# Altium PCB PCB2.PcbDoc
Units mm, origin at the board's own origin, x right, y up, seen from the top; angles counter-clockwise.
Board outline 115 x 60 mm, 2 copper layers (Top Layer, Bottom Layer); 32 components, 23 nets, 151 pads, 66 vias.
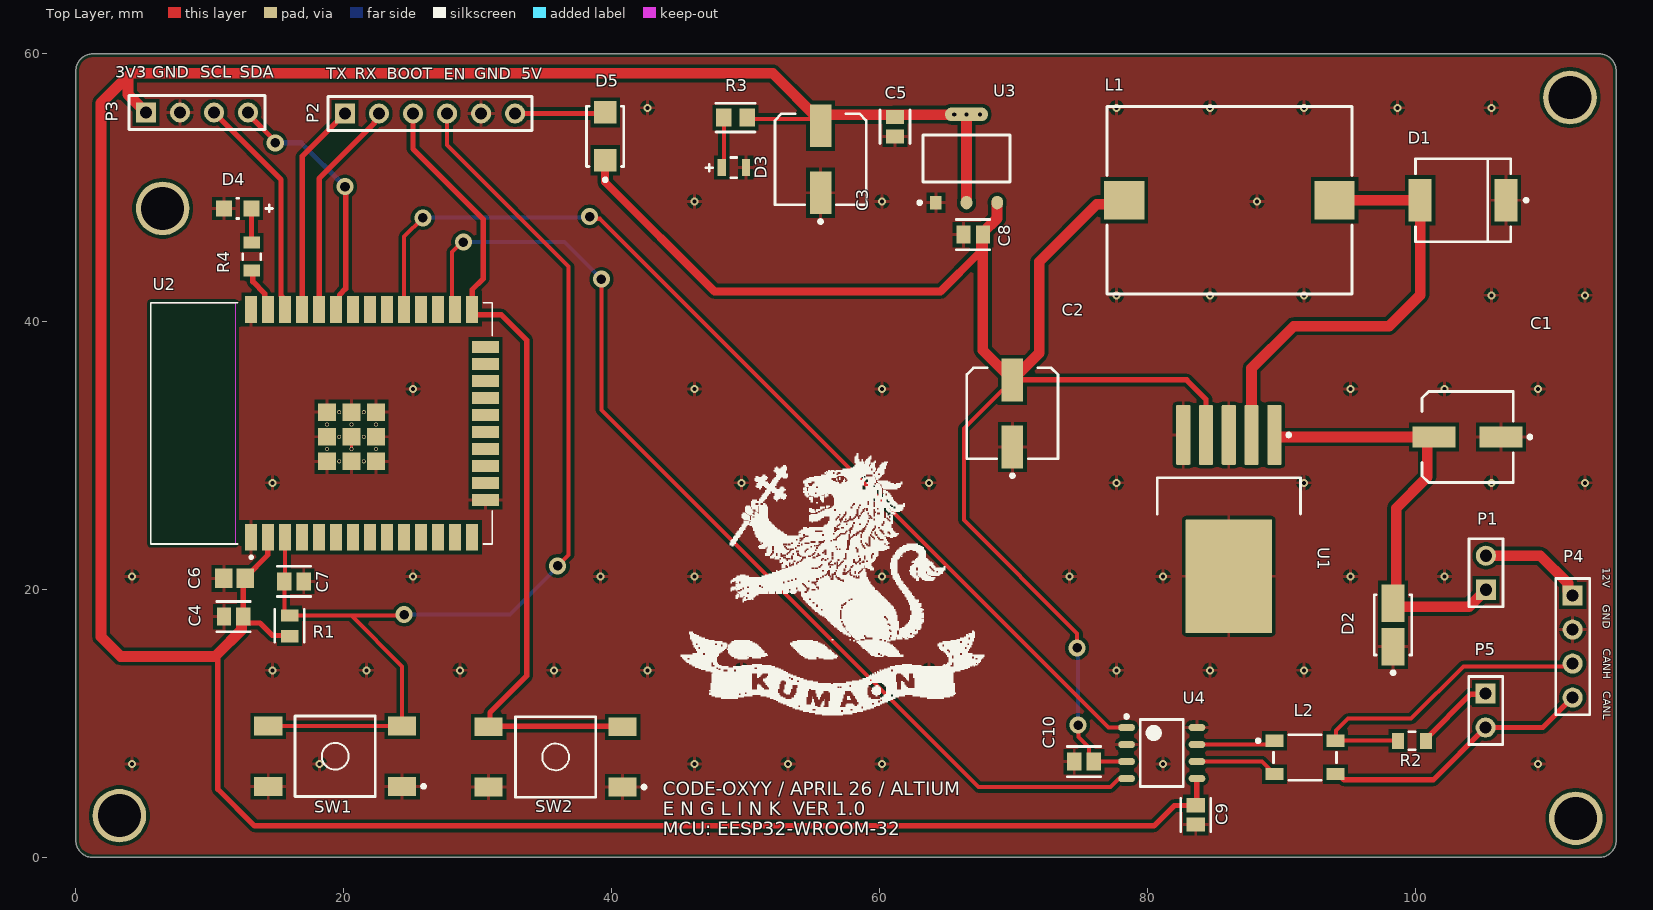
[diagram p0: Top Layer view]
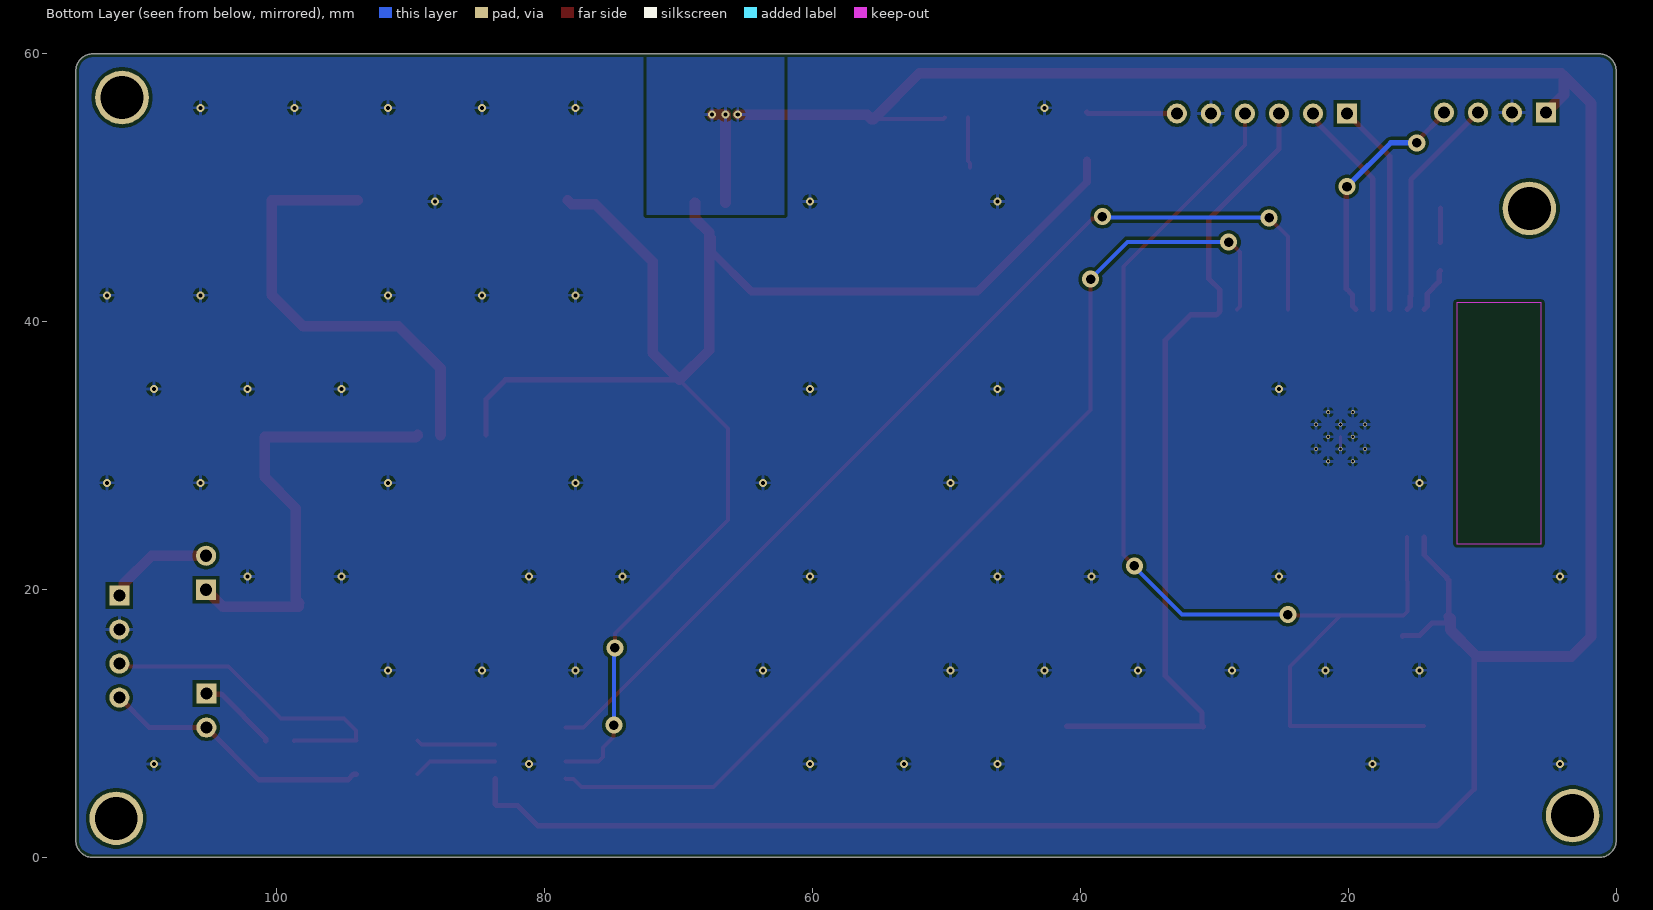
[diagram p1: Bottom Layer view, seen from below]
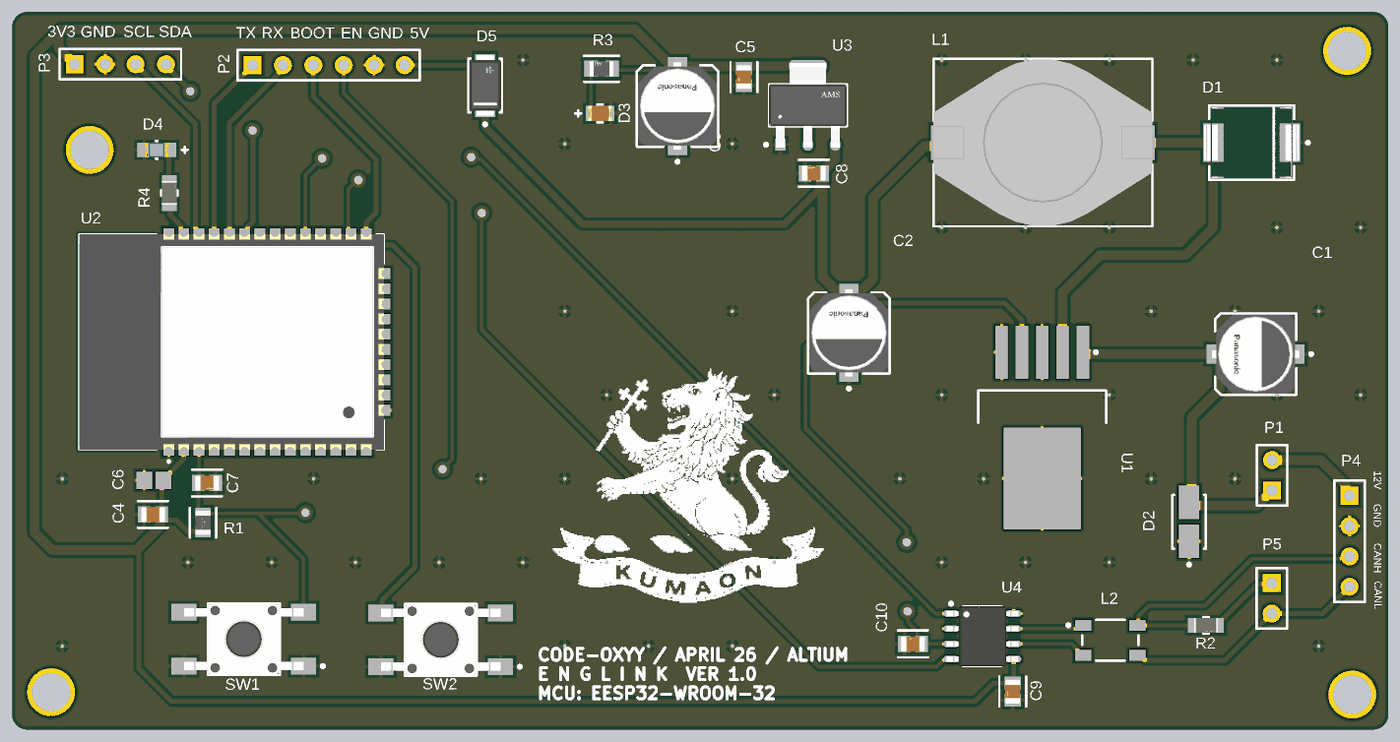
[diagram p2: 3D render of the assembled board from above, using the file's embedded part models]

## Layer stack, top to bottom
Top Solder: solder mask 0.0102, Solder Resist, Dk 3.5
Top Layer: signal copper 0.0356
Dielectric 1: dielectric 0.32, FR-4, Dk 4.8
Bottom Layer: signal copper 0.0356
Bottom Solder: solder mask 0.0102, Solder Resist, Dk 3.5

## Board outline
0,1.27 0,58.73 cw(c1.27,58.73) 1.27,60 113.73,60 cw(c113.73,58.73) 115,58.73 115,1.27 cw(c113.73,1.27) 113.73,0 2.5,0 1.27,0 cw(c1.27,1.27)

## Design rules (kind name [scope] priority, off if disabled: settings)
BoardOutlineClearance [All] p1: gap=0.254 ignorepadtopadclearanceinfootprint=FALSE except(0: Arc-SplitContinuation Track-SplitContinuation SMDPad-SplitContinuation THPad-SplitContinuation Via-SplitContinuation Fill-SplitContinuation Poly-SplitContinuation Region-SplitContinuation Text-SplitContinuation)
Clearance [All] p1: gap=0.254 ignorepadtopadclearanceinfootprint=FALSE
PolygonConnect [All] p1: connectstyle=Relief reliefconductorwidth=0.254 reliefentries=4 polygonreliefangle="90 Angle" airgapwidth=0.254
RoutingVias [All] p1: holewidth=0.711 width=1.27 viastyle="Through Hole" minholewidth=0.711 minwidth=1.27 maxholewidth=6 maxwidth=6
SolderMaskExpansion [All] p1: expansion=0.102 istentingtop=FALSE
SupplyNets "Schematic Supply Nets_4" [InNet('+5_USB')] p1: voltage=0.000
SupplyNets "Schematic Supply Nets_3" [InNet('3V3')] p2: voltage=0.000
SupplyNets "Schematic Supply Nets_2" [InNet('GND')] p3: voltage=0.000
SupplyNets "Schematic Supply Nets_1" [InNet('+5')] p4: voltage=0.000
SupplyNets "Schematic Supply Nets" [InNet('+12')] p5: voltage=0.000
Width [All] p1: maxlimit=1 minlimit=0.254 preferedwidth=0.254 minimp=50.000000 maximp=50.000000 favimp=50.000000
30 further rules are at their usual default settings.

## Components (designator, comment, footprint, x,y, rotation, side; value= is the part's Value field where it differs from the comment)
C1 "EEE-TQV101XAP" FP-TQD8-MFG 103.911,31.394 r180 top
C2 "EEE-TQV101XAP" FP-TQD8-MFG 69.926,33.162 r90 top
C3 "EEE-TQV101XAP" FP-TQD8-MFG 55.601,52.134 r90 top
C4 "GRM21BZ71C106KE15L" FP-GRM21B-0_2-e0_2_0_7-IPC_C 11.771,17.983 r180 top
C5 "GRM21BZ71C106KE15L" FP-GRM21B-0_2-e0_2_0_7-IPC_C 61.158,54.562 r270 top
C6 "C0805S104K5RACTU" CAPC2013X145X50NL20T25 11.848,20.839 r0 top
C7 "GRM21BZ71C106KE15L" FP-GRM21B-0_2-e0_2_0_7-IPC_C 16.287,20.614 r0 top
C8 "GRM21BZ71C106KE15L" FP-GRM21B-0_2-e0_2_0_7-IPC_C 66.991,46.507 r180 top
C9 "GRM21BZ71C106KE15L" FP-GRM21B-0_2-e0_2_0_7-IPC_C 83.617,3.175 r270 top
C10 "GRM21BZ71C106KE15L" FP-GRM21B-0_2-e0_2_0_7-IPC_C 75.271,7.163 r180 top
D1 "SS34-E3/57T" FP-95402-MFG 103.577,49.073 r180 top
D2 "SMAJ15CA-E3/5A" VISH-DO-214AC-2_M 98.349,17.374 r90 top
D3 "SML-LX0805SRC-TR" FP-SML-LX0805SRC-TR-MFG 49.124,51.511 r0 top
D4 "SM0805UBWC" FP-SM0805UBWC-MFG 12.078,48.463 r180 top
D5 "SSA34HE3_A/I" FP-95400-MFG 39.522,53.848 r90 top
L1 "SDR1806-330ML" BOUR-SDR1806_V 86.131,49.073 r180 top
L2 "ACT45B-510-2P-TL003" TDK-ACT45B-510-2P-TL003-4_V 91.77,7.468 r0 top
P1 "Header 2" HDR1X2 105.283,19.99 r90 top
P2 "Header 6" HDR1X6 20.091,55.55 r0 top
P3 "Header 4" HDR1X4 5.232,55.626 r0 top
P4 "Header 4" HDR1X4 111.76,19.558 r270 top
P5 "Header 2" HDR1X2 105.258,12.243 r270 top
R1 "CRGCQ0805J10K" FP-CRGCQ0805-IPC_C 15.951,17.297 r270 top value=10KΩ
R2 "AC0805FR-07120RL" FP-AC0805-MFG 99.763,8.712 r0 top value=120Ω
R3 "RMCF0805JG1K00" FP-RMCF0805-IPC_B 49.251,55.245 r180 top
R4 "AC0805FR-07120RL" FP-AC0805-MFG 13.132,44.865 r90 top value=120Ω
SW1 "1301.9320" FP-1301_9320-MFG 19.359,7.559 r180 top
SW2 "1301.9320" FP-1301_9320-MFG 35.818,7.508 r180 top
U1 "LM2596S-5.0/NOPB" KTT0005B_M 86.081,25.248 r270 top
U2 "ESP32-WROOM-32" MODULE_ESP32-WROOM-32 18.337,32.414 r90 top
U3 "AMS1117-3.3" FP-AMS1117-IPC_C 66.497,52.19 r90 top
U4 "TJA1051T/3,118" NXP-SOIC-8_L 81.077,7.798 r0 top

## Footprints (in the part's own frame and the unit in brackets; to place one, negate y for a bottom-side part, rotate by r counter-clockwise, add the part's x,y. Pads: shape width x height; smd on the part's side, far side on the other; paste and mask are expansions set on the pad)
BOUR-SDR1806_V [mm] "SMD, 2-Leads, Body 18.3x14mm"
  rect 3x2.9 smd: 1(-7.85,0) 2(7.85,0)
  silkscreen extent -9.15,-7 9.15,7, body extent -9.15,-7 9.15,7, height 6.6
CAPC2013X145X50NL20T25 [mm] "Chip Capacitor, 2-Leads, Body 2.00x1.25mm, IPC Medium Density"
  rect 1.3x1.45 smd: 1(-0.8,0) 2(0.8,0)
  body extent -1.1,-0.72 1.1,0.72, height 1.45
FP-1301_9320-MFG [mm]
  rect 2.1x1.4 smd paste+0 mask+0: 1(-5,2.25) 2(5,2.25) 3(-5,-2.25) 4(5,-2.25)
  silkscreen extent -6.73,-3 3,3, body extent -6.15,-3.1 6.15,3.1, height 0.25
FP-95400-MFG [mm]
  rect 1.7x1.68 smd paste+0 mask+0: 1(-1.79,0) 2(1.79,0)
  silkscreen extent -3.37,-1.4 2.25,1.4, body extent -2.74,-1.5 2.74,1.5, height 0.25
FP-95402-MFG [mm]
  rect 1.72x3.2 smd paste+0 mask+0: 1(-3.205,0) 2(3.205,0)
  silkscreen extent -4.83,-3.11 3.55,3.11, body extent -4.17,-3.21 4.17,3.21, height 0.25
FP-AC0805-MFG [mm]
  rect 0.9x1.2 smd paste+0 mask+0: 1(-1.05,0) 2(1.05,0)
  silkscreen extent -0.23,-0.67 0.23,0.67, body extent -1.6,-0.77 1.6,0.77, height 0.25
FP-AMS1117-IPC_C [mm]
  rect 1.004x0.872 smd paste+0 mask+0: 1(-3.295,2.29)
  rrect100% 1.004x0.872 smd paste+0 mask+0: 2(-3.295,0) 3(-3.295,-2.29)
  rrect87% 1.004x3.182 smd paste+0 mask+0: 4(3.295,0)
  silkscreen extent -3.42,-3.25 1.75,3.62, body extent -3.9,-3.35 3.9,3.35, height 0.25
FP-CRGCQ0805-IPC_C [mm]
  rect 0.906x1.31 smd paste+0 mask+0: 1(-0.776,0) 2(0.776,0)
  silkscreen extent -1.23,-1.1 1.23,1.1, body extent -1.33,-0.8 1.33,0.8, height 0.25
FP-GRM21B-0_2-e0_2_0_7-IPC_C [mm]
  rect 1.055x1.356 smd paste+0 mask+0: 1(-0.726,0) 2(0.726,0)
  silkscreen extent -1.25,-1.12 1.25,1.12, body extent -1.35,-0.82 1.35,0.82, height 0.25
FP-RMCF0805-IPC_B [mm]
  rect 1.155x1.362 smd paste+0 mask+0: 1(-0.876,0) 2(0.876,0)
  silkscreen extent -1.45,-1.08 1.45,1.08, body extent -1.7,-0.93 1.7,0.93, height 0.25
FP-SM0805UBWC-MFG [mil]
  rect 47x47 smd paste+0 mask+0: 1(-40.5,0) 2(40.5,0)
  silkscreen extent -102,-30 3,30, body extent -68,-33 68,33, height 10
FP-SML-LX0805SRC-TR-MFG [mm]
  rect 0.6x1.25 smd paste+0 mask+0: 1(-0.9,0) 2(0.9,0)
  silkscreen extent -2.07,-0.75 0.22,0.75, body extent -1.3,-0.85 1.3,0.85, height 0.25
FP-TQD8-MFG [mm]
  rect 3.2x1.6 smd paste+0 mask+0: 1(-2.5,0) 2(2.5,0)
  silkscreen extent -4.78,-3.4 3.4,3.4, body extent -4.35,-3.65 4.35,3.65, height 0.25
HDR1X2 [mm] "Connector; Header; 2 Position"
  rect 1.5x1.5 hole 0.9: 1(0,0)
  round 1.5 hole 0.9: 2(2.54,0)
  silkscreen extent -1.27,-1.27 3.81,1.27
HDR1X4 [mm] "Connector; Header; 4 Position"
  rect 1.5x1.5 hole 0.9: 1(0,0)
  round 1.5 hole 0.9: 2(2.54,0) 3(5.08,0) 4(7.62,0)
  silkscreen extent -1.27,-1.27 8.89,1.27
HDR1X6 [mm] "Connector; Header; 6 Position"
  rect 1.5x1.5 hole 0.9: 1(0,0)
  round 1.5 hole 0.9: 2(2.54,0) 3(5.08,0) 4(7.62,0) 5(10.16,0) 6(12.7,0)
  silkscreen extent -1.27,-1.27 13.97,1.27
KTT0005B_M [mm] "DPAK, 5-Leads, Body 10.65x9.65mm, Pitch 1.7mm, IPC Low Density"
  rrect10% 4.45x1.05 smd: 1(-6.3,3.4) 2(-6.3,1.7) 3(-6.3,0) 4(-6.3,-1.7) 5(-6.3,-3.4)
  rrect2% 8.5x6.45 smd: 6(4.25,0)
  silkscreen extent -6.42,-5.35 -0.4,5.35, body extent -3.1,-5.32 6.55,5.33, height 4.83
MODULE_ESP32-WROOM-32 [mm]
  rect 2x0.9 smd: 1(-8.5,5.26) 2(-8.5,3.99) 3(-8.5,2.72) 4(-8.5,1.45) 5(-8.5,0.18) 6(-8.5,-1.09) 7(-8.5,-2.36) 8(-8.5,-3.63) 9(-8.5,-4.9) 10(-8.5,-6.17) 11(-8.5,-7.44) 12(-8.5,-8.71) 13(-8.5,-9.98) 14(-8.5,-11.25) 25(8.5,-11.25) 26(8.5,-9.98) 27(8.5,-8.71) 28(8.5,-7.44) 29(8.5,-6.17) 30(8.5,-4.9) 31(8.5,-3.63) 32(8.5,-2.36) 33(8.5,-1.09) 34(8.5,0.18) 35(8.5,1.45) 36(8.5,2.72) 37(8.5,3.99) 38(8.5,5.26)
  rect 0.9x2 smd: 15(-5.715,-12.25) 16(-4.445,-12.25) 17(-3.175,-12.25) 18(-1.905,-12.25) 19(-0.635,-12.25) 20(0.635,-12.25) 21(1.905,-12.25) 22(3.175,-12.25) 23(4.445,-12.25) 24(5.715,-12.25)
  rect 1.33x1.33 smd: 39_1(-2.835,-0.405) 39_2(-1,-0.405) 39_3(0.835,-0.405) 39_4(-2.835,-2.24) 39_5(-1,-2.24) 39_6(0.835,-2.24) 39_7(-2.835,-4.075) 39_8(-1,-4.075) 39_9(0.835,-4.075)
  round 0.3 hole 0.2: 39_10(-1.917,-0.405) 39_11(-0.082,-0.405) 39_12(-2.835,-1.322) 39_13(-1,-1.322) 39_14(0.835,-1.322) 39_15(-1.917,-2.24) 39_16(-0.082,-2.24) 39_17(-2.835,-3.157) 39_18(-1,-3.157) 39_19(0.835,-3.157) 39_20(-1.917,-4.075) 39_21(-0.082,-4.075)
  Keep-Out Layer region: 9,6.45 -9,6.45 -9,12.75 9,12.75
  Keep-Out Layer region: 9,6.45 -9,6.45 -9,12.75 9,12.75
  silkscreen extent -10.1,-12.75 9,12.75, body extent -9,-12.75 9,12.75, height 3.2
NXP-SOIC-8_L [mm] "SOIC, 8-Leads, Body 5x4mm, Pitch 1.27mm, IPC High Density"
  oval 1.25x0.55 smd: 1(-2.625,1.905) 2(-2.625,0.635) 3(-2.625,-0.635) 4(-2.625,-1.905) 5(2.625,-1.905) 6(2.625,-0.635) 7(2.625,0.635) 8(2.625,1.905)
  silkscreen extent -2.75,-2.5 1.6,2.85, body extent -3,-2.5 3,2.5, height 1.75
TDK-ACT45B-510-2P-TL003-4_V [mm] "SMD, 4-Leads, Body 4.7x3.4mm, Pitch 2.5mm"
  rect 1.35x0.9 smd: 1(-2.275,1.25) 2(-2.275,-1.25) 3(2.275,-1.25) 4(2.275,1.25)
  silkscreen extent -3.62,-1.7 2.35,1.7, body extent -2.35,-1.7 2.35,1.7, height 3
VISH-DO-214AC-2_M [mm] "DO-214AC, 2-Leads, Body 4.5x2.79mm, IPC Low Density"
  rect 2.8x1.7 smd: 1(-1.625,0) 2(1.625,0)
  silkscreen extent -3.7,-1.4 2.25,1.4, body extent -2.25,-1.39 2.25,1.4, height 2.29

## Part data
C1 C2 C3: library part CMP-05427-000054-1, "CAP ALUM 100UF 20% 35V SMD", Capacitance=100uF, Case/Package=Radial, ESR (Equivalent Series Resistance)=300mR, Max Operating Temperature=125°C, Min Operating Temperature=-40°C, Package Quantity=900, Ripple Current=197mA, Tolerance=20%, Voltage=35V, Construction=Cylindrical, Diameter=6.3mm, Height=7.7mm, Height - Seated (Max)=0.315inch, Lead Diameter=0.65mm, Lead Free="Lead Free", Lead Pitch=1.8mm, Length=7.7mm, Life (Hours)=2000Hour, Mount="Surface Mount", Number of Pins=8, Packaging="Tape and Reel", REACH SVHC="No SVHC", Ripple Current (AC)=197mA, RoHS Compliant=Yes, Series=TQ, Termination=SMD/SMT, Voltage Rating=35V, Voltage Rating (DC)=35V
C4 C5 C7 C8 C9 C10: library part CMP-06035-007712-1, "Chip Multilayer Ceramic Capacitors for General Purpose, 0805, 10uF, X7R, 15%, 10%, 16V"
C6: library part CMP-2007-01227-1, Manufacturer=Kemet, Part Number=C0805S104K5RACTU
D1: library part CMP-02539-000012-1, "DIODE SCHOTTKY 40V 3A DO214AB", Forward Current=3A, Manufacturer=Vishay, Max Junction Temp=+150°C, Max Repetitive Reverse Voltage=40V, Max Surge Forward Current=100A, Package=95402, Peak Reverse Current=0.5mA, Temperature="-55°C to +150°C", Temperature Range Low=-55°C, Automotive=No, Category=Diode, ComponentLink2Description=Datasheet, ComponentLink2URL=http://www.vishay.com/docs/88751/ss32.pdf, Device Class L1="Discrete Semiconductors", Device Class L2=Diodes, Device Class L3="Schottky Diodes", Digikey Description="DIODE SCHOTTKY 40V 3A DO214AB", Footprint Url=http://www.vishay.com/docs/95402/smc.pdf, Height=2.62mm, Lead Free=Yes, Manufacturer Part Number=SS34-E3/57T, Mouser Description="Schottky Diodes & Rectifiers 3.0 Amp 40 Volt", Octopart=https://octopart.com/ss34-e3%2F57t-vishay-39552907, RoHS=TRUE, Standoff Height=0mm, Temperature Range High=+150°C
D2: library part CMP-0548-00263-2, "Transient Voltage Suppressor, 6.40 to 231 V, 15 V Stand-off Voltage, Bi-Directional, -55 to 155 degC, 2-pin DO-214AC, Pb-Free, Tape and Reel", Manufacturer="Vishay Semiconductor", Operating Junction and Storage Temperature Range="-55 to 150 degC", ComponentLink1Description="Manufacturer URL", ComponentLink1URL=http://www.vishay.com/, ComponentLink2Description=Datasheet, ComponentLink2URL=http://www.vishay.com/docs/88390/smaj50a.pdf, ComponentLink3Description="Package Specification", ComponentLink3URL=http://www.vishay.com/docs/88390/smaj50a.pdf, DatasheetVersion=12/8/2013, ID (uA)=2, IFSM="40 A", Mounting Technology="Surface Mount", PackageDescription="2-Pin DO-214AC (SMA), Body 4.245 x 2.665 mm", PackageReference=DO-214AC-2, Packing="Tape and Reel", PartNumber=SMAJ15CA-E3/5A, PPPM (W)="400, 300", RoHS=TRUE, VBR Bi-Directional (V)="6.4 to 231", VWM (V)=15
D3: library part CMP-57192-000013-1, "LED RED CLEAR SMD", Case Code (Imperial)=0805, Case Code (Metric)=2012, Color=Red, Current Rating=25mA, Forward Current=20mA, Forward Voltage=1.7V, Lens Color=Colorless, Max Operating Temperature=85°C, Min Operating Temperature=-40°C, Package Quantity=3000, Power Rating=100mW, Approvals=UL, Case/Package=0805, Dominant Wavelength=660nm, Height=1.2mm, Illumination Color=Red, Lead Free="Lead Free", Length=2mm, Lens Style=Clear, Lens Transparency=Clear, Luminous Intensity=25mcd, Mount="Surface Mount", Number of LEDs=1, Number of Pins=2, Packaging="Tape and Reel", RoHS Compliant=Yes, Series=-, Test Current=20mA, Viewing Angle=140°, Voltage Rating=1.7V, Voltage Rating (DC)=1.7V, Wavelength=660nm, Width=1.25mm
D4: library part CMP-35283-000004-1, "LED BLUE CLEAR 0805 SMD", Case Code (Imperial)=0805, Case Code (Metric)=2012, Color=Blue, Forward Current=20mA, Forward Voltage=3.3V, Lens Color=Colorless, Max Operating Temperature=80°C, Min Operating Temperature=-30°C, Package Quantity=3000, Power Rating=100mW, Case/Package=0805, Dominant Wavelength=470nm, Height=1.1mm, Illumination Color=Blue, Lead Free="Lead Free", Length=2mm, Lens Style=Rectangular, Lens Transparency=Clear, Luminous Intensity=115mcd, Mount="Surface Mount", Number of Pins=2, Packaging="Tape and Reel", Test Current=20mA, Viewing Angle=130°, Wavelength=470nm, Width=1.2mm
D5: library part CMP-02539-000063-1, "DIODE SCHOTTKY 40V 3A DO214AC", Average Rectified Current=3A, Case/Package=DO-214AC, Forward Voltage=380mV, Max Forward Surge Current (Ifsm)=75A, Max Operating Temperature=150°C, Max Repetitive Reverse Voltage (Vrrm)=40V, Max Reverse Current=17mA, Min Operating Temperature=-65°C, Package Quantity=7500, Element Configuration=Single, Forward Current=3A, Max Reverse Voltage (DC)=40V, Mount="Surface Mount", Packaging="Tape and Reel", Peak Non-Repetitive Surge Current=75A, Radiation Hardening=No, Reverse Voltage (DC)=40V, RoHS Compliant=Yes, Series="Automotive, AEC-Q101"
L1: library part CMP-2000-07043-1, "Power Inductor, 33 uH, +/- 20%, -40 to 125 degC, 2-Pin SMD, RoHS, Tape and Reel", Inductance=33uH, Manufacturer=Bourns, Maximum DC Current=3A, Maximum DC Resistance=68mOhm, Package Description="2-Pin Surface Mount Device, Body 18.3 x 14 mm", Package Reference=SDR1806, Package/Case=18.6X14.3X6.9, Tolerance=20%, Core Material=Ferrite, Datasheet URL=http://www.bourns.com/docs/Product-Datasheets/SDR1806.pdf, Datasheet Version=09/2010, Manufacturer URL=http://www.bourns.com/, Minimum Quality Factor=24@2.52MHz, Mounting Technology=SurfaceMount, Packaging=Tape&Reel, Product Depth=14.3mm, Product Height=6.9mm, Rad Hard=No, Type=Power
L2: library part CMP-2000-05391-1, "Common-Mode Choke for CAN Bus System, 51uH, 50 V DC, -40 to 150 degC, 4-Pin SMD, RoHS, Tape and Reel", Current=200mA, DC Resistance (DCR)=1OhmMax, Inductance=51µH, Manufacturer=TDK, Operating Temperature=-40degC~150degC, Package / Case=Horizontal,4PCPad, Standard Package=1, Catalog Drawings="(ACM4532,ACT45B)-xxx-2P_Top /  / ACT45B-xxx-2P_Side /  / ACT45B-xxx-2P_Bottom", Category=Filters, Datasheet URL=https://datasheet.ciiva.com/22726/1649098-22726290.pdf, Datasheet Version=Aug-12, Dynamic Catalog=ACTSeries, Family=CommonModeChokes, Featured Product=FerriteChipCommon-ModeFilterforCAN-BUSSystem, Filter Type=Data,SignalLine, Height (Max)="0.118\"(3.00mm)", Impedance=2.8kOhm, Manufacturer URL=http://www.tdk.com/, Mounting Type=SurfaceMount, Number of Lines=2, Other Drawings="ACM3225SeriesSchematic /  / ACT45B-xxx-2P_Footprint", Other Names=445-3958-6, Packaging=Digi-Reel, Series=ACT, Size / Dimension="0.177\"Lx0.126\"W(4.50mmx3.20mm)"
P1 P5: "Header, 2-Pin", LatestRevisionDate=17-Jul-2002, LatestRevisionNote="Re-released for DXP Platform.", Publisher="Altium Limited"
P2: "Header, 6-Pin", LatestRevisionDate=17-Jul-2002, LatestRevisionNote="Re-released for DXP Platform.", Publisher="Altium Limited"
P3 P4: "Header, 4-Pin", LatestRevisionDate=17-Jul-2002, LatestRevisionNote="Re-released for DXP Platform.", Publisher="Altium Limited"
R1: library part CMP-03211-002989-1, "CRGCQ 0805 10K 5%", Ambient Temperature Range High=+70°C, Manufacturer="TE Connectivity", Package=CRGCQ0805, Power Rating=0.125W, Resistance=10KΩ, Temperature="-55°C to +155°C", Temperature Coefficient=±100ppm/°C, Temperature Range High=+155°C, Temperature Range Low=-55°C, Tolerance=0.05, Voltage Rating=150V, Automotive=Yes, Automotive Grade="Grade 914", Category=Res, ComponentLink2Description=Datasheet, ComponentLink2URL=https://www.te.com/commerce/DocumentDelivery/DDEController?Action=showdoc&DocId=Data+Sheet%7F1773204-3%7F1%7Fpdf%7FEnglish%7FENG_DS_1773204-3_1.pdf%7F4-2176341-923, Composition="Thick Film", Device Class L1="Passive Components", Device Class L2=Resistors, Device Class L3="Chip SMD Resistors", Digikey Description="CRGCQ 0805 10K 5%", Height=0.65mm, Ipc Land Pattern Name=RESC200125X55, Lead Free=Yes, Manufacturer Part Number=CRGCQ0805J10K, Mouser Description="Res Thick Film 0805 10K Ohm 5% 0.125W(1/8W) ±100ppm/C Pad SMD Automotive T/R", Octopart=https://octopart.com/crgcq0805j10k-te+connectivity-91018201, RoHS=TRUE, Series=CRGCQ
R2 R4: library part CMP-03412-037684-1, "RES SMD 120 OHM 1% 1/8W 0805", Manufacturer=Yageo, Package=AC0805, Power Rating=1/8W, Resistance=120Ω, Temperature="-55°C to +155°C", Temperature Range High=+155°C, Temperature Range Low=-55°C, Tolerance=0.01, Voltage Rating=150V, Automotive=Yes, Automotive Grade="Grade 0", Category=Res, ComponentLink2Description=Datasheet, ComponentLink2URL=http://www.yageo.com/documents/recent/PYu-AC_51_RoHS_L_6.pdf, Composition="Thick Film", Device Class L1="Passive Components", Device Class L2=Resistors, Device Class L3="Chip SMD Resistors", Digikey Description="RES SMD 120 OHM 1% 1/8W 0805", Footprint Url=http://www.yageo.com/exep/pages/download/literatures/PYu-R_Mount_10.pdf, Height=0.6mm, Ipc Land Pattern Name=RESC200125X50, Lead Free=Yes, Manufacturer Part Number=AC0805FR-07120RL, Mouser Description="Res Thick Film 0805 120 Ohm 1% 0.125W(1/8W) ±100ppm/C Epoxy Pad SMD Automotive T/R", Octopart=https://octopart.com/ac0805fr-07120rl-yageo-30510890, RoHS=TRUE, Series=AC
R3: library part CMP-26527-002856-1, "1kΩ ±5% 0.125W 0805 Thick Film Chip Resistor AEC-Q200 compliant", Case Code (Imperial)=0805, Case Code (Metric)=2012, Max Operating Temperature=155°C, Max Power Dissipation=125mW, Min Operating Temperature=-55°C, Resistance=1kR, Resistor Type="Thick Film", Temperature Coefficient=200ppm/°C, Tolerance=5%, Case/Package=0805, Contact Plating=Tin, Features="Automotive AEC-Q200", Height=0.026inch, Length=0.079inch, Mount="Surface Mount", Number of Terminations=2, Packaging="Tape and Reel", Radiation Hardening=No, RoHS Compliant=Yes, Series=RMCF, Width=0.049inch
SW1 SW2: library part CMP-26321-000001-1, "SWITCH TACTILE SPST-NO 0.05A 12V", Contact Current Rating=50mA, Contact Resistance=100mΩ, Manufacturer=Schurter, Operating Force=1.6N, Package=0, Temperature="-20°C to +70°C", Temperature Range High=+70°C, Temperature Range Low=-20°C, Voltage Rating Dc=12V, Automotive=No, Category=Switch, ComponentLink2Description=Datasheet, ComponentLink2URL=https://www.schurter.com/en/datasheet/typ_6x6_mm_tact_switches.pdf, Device Class L1=Electromechanical, Device Class L2=Switches, Device Class L3="Tactile Switches", Digikey Description="SWITCH TACTILE SPST-NO 0.05A 12V", Electromechanical Life=100000Cycles, Height=12.5mm, Lead Free=Yes, Manufacturer Part Number=1301.9320, Mount="Surface Mount", Octopart=https://octopart.com/1301.9320-schurter-6627962, RoHS=TRUE, Throw Configuration=SPST-NO
U1: library part CMP-0069-00269-3, "SIMPLE SWITCHER® Power Converter 150 KHz 3A Step-Down Voltage Regulator, 5-pin TO-263, Pb-Free", Manufacturer="Texas Instruments", PackageTopMarking="NSUZXYTTE#*LM2596S*-5.0 P+", PowerWise=N, Code_JEDEC=MO-169-AB, ComponentLink1Description="Datasheet URL", ComponentLink1URL=http://www.ti.com/general/docs/lit/getliterature.tsp?genericPartNumber=LM2596&fileType=pdf, CompType=Switcher, PackageDescription="TO-263, Molded, .400 x .390 x .180in, 5 Lead, .067in Pitch, Surface Mount", PackageReference=KTT0005B, PinCount=5, RoHS=Y
U2: "Bluetooth, WiFi 802.11b/g/n, Bluetooth v4.2 +EDR, Class 1, 2 and 3 Transceiver Module 2.4GHz ~ 2.5GHz Antenna Not Included, U.FL Surface Mount", Package="Module Espressif Systems", Availability="In Stock", Check_prices=https://www.snapeda.com/parts/ESP32-WROOM-32/Espressif+Systems/view-part/?ref=eda, MF="Espressif Systems", MP=ESP32-WROOM-32, Price=None, Purchase-URL=https://pricing.snapeda.com/search/part/ESP32-WROOM-32/?ref=eda, SnapEDA_Link=https://www.snapeda.com/parts/ESP32-WROOM-32/Espressif+Systems/view-part/?ref=snap
U3: library part CMP-209535-000001-1, "LDO Voltage Regulators 1A, 3.3V", Dropout Voltage=1.1V, Manufacturer="Advanced Monolithic Systems", Max Junction Temp=+125°C, Max Power Dissipation=1.2W, Max Supply Voltage=15V, Nominal Supply Current=5mA, Output Current=1A, Output Voltage=3.3V, Package=AMS1117, Temperature="-40°C to +125°C", Temperature Range Low=-40°C, Automotive=No, Category=IC, ComponentLink2Description=Datasheet, ComponentLink2URL=http://www.advanced-monolithic.com/pdf/ds1117.pdf, Device Class L1="Integrated Circuits (ICs)", Device Class L2="Power Management ICs", Device Class L3="Voltage Regulators - Linear", Height=1.8mm, Ipc Land Pattern Name=SOT229P700X180-4, Lead Free=Yes, Manufacturer Part Number=AMS1117-3.3, Number of Outputs=1, Octopart=https://octopart.com/ams1117-3.3-advanced+monolithic+systems-25899300, Output Type=Fixed, RoHS=TRUE, Standoff Height=0.64mm, Temperature Range High=+125°C
U4: library part CMP-2000-07245-1, "High-Speed CAN Transceiver, 3 to 5 V, 8-Pin SOIC (SOT96-1), RoHS, Tape and Reel", Manufacturer=NXP, Operating Supply Voltage (Max)=5.5V, Operating Supply Voltage (Min)=4.5V, Operating Supply Voltage (Typ)=5V, Operating Temperature (Max)=125C, Operating Temperature (Min)=-40C, Operating Temperature Classification=Automotive, Package Description="8-Pin Small Outline Integrated Circuit, Body 4.9 x 3.9 mm, Pitch 1.27 mm", Package Reference=SOT96-1, Package Type=SO, Power Down Mode=Normal/Silent, Supply Current=70mA, Category=Transceiver, Data Rate=1Mbps, Datasheet URL=http://www.nxp.com/documents/data_sheet/TJA1051.pdf, Datasheet Version="Rev. 7, 01/2015", DELETED=Compliant, Manufacturer URL=http://www.nxp.com/, Mounting=SurfaceMount, Mounting Technology=SurfaceMount, Number of Transceivers=1, Packaging=TapeandReel, Pin Count=8, Rad Hardened=No, Standard Supported=ISO11898-2

## Free pads (board coordinates)
  round 4 hole 3.2 unplated: M9(3.251,3.124) M10(111.989,2.921) M11(111.557,56.744) M12(6.477,48.463)

## Via types
v1: diameter 0.6, hole 0.3, Top Layer to Bottom Layer, tented both sides, 56 vias
v2: diameter 1.27, hole 0.711, Top Layer to Bottom Layer, tented both sides, 10 vias

## Nets (pads, with @x,y where several pads share a name; then routed paths per layer and width w, separated by ;. In a path a pad name is that pad's centre, name@x,y a point inside that pad or via, vN(x,y) a via of type N, cw(c..) or ccw(c..) an arc to the next point about the centre after c; other vN are vias at no path point)
3V3: C3.2 C4.1 C5.1 C6.2 C9.1 P3.1 R1.2 R3.1 U2.2 U3.2 U3.4 U4.5 | length 233
  Top Layer w0.3: R3.1 50.228,55.144 C3.2@55.601,55.144
  Top Layer w0.4: 10.592,15.215 10.592,5.105 13.335,2.362 80.493,2.362 82.014,3.884 83.6,3.884 C9.1 83.702,3.986 U4.5 ; C4.1@12.497,17.832 12.824,17.505 13.737,17.505 14.671,16.571 15.901,16.571 R1.2 ; C4.1 12.497,20.687 C6.2 12.648,20.914 14.326,22.591 14.326,23.892 U2.2
  Top Layer w0.8: P3.1 3.886,56.972 3.886,58.344 ; C4.1 12.369,17.856 12.369,16.992 10.592,15.215 10.389,15.011 3.353,15.011 1.88,16.485 1.88,56.337 3.886,58.344 ; C5.1@60.96,55.448 60.477,55.448 55.905,55.448 55.601,55.144 55.431,55.144 52.027,58.547 4.089,58.547 3.886,58.344 ; C5.1@60.978,55.467 65.576,55.467 v1(65.583,55.474) ; U3.2 v1(66.497,55.485) 66.509,55.474 v1(67.513,55.474)
+5: C2.2 C8.1 C10.1 D5.1 L1.2 U1.4 U3.3 U4.3 | length 122.1
  Top Layer w0.3: C2.2 66.294,32.029 66.294,25.197 74.752,16.739 v2(74.752,15.646) ; v2(74.828,9.881) 74.864,9.845 74.864,8.982 75.641,8.204 75.641,7.518 C10.1 U4.3
  Top Layer w0.4: C2.2 82.931,35.662 84.381,34.212 U1.4
  Top Layer w0.6: D5.1 39.522,50.419 47.676,42.266 64.567,42.266 67.489,45.188 67.489,46.28 C8.1
  Top Layer w0.8: C8.1 67.716,37.871 C2.2 71.933,37.668 71.933,44.475 76.233,48.775 77.984,48.775 L1.2 ; C8.1@67.716,46.658 68.773,47.715 68.773,48.881 U3.3
  Bottom Layer w0.3: v2(74.752,15.646) 74.823,15.576 74.823,14.783 74.828,14.777 v2(74.828,9.881)
+5_USB: D5.2 P2.6 | length 6.8
  Top Layer w0.4: P2.6 39.434,55.55 D5.2
+12: C1.2 D2.2 P1.1 U1.1 | length 32.2
  Top Layer w0.8: U1.1 89.481,31.519 89.606,31.394 C1.2@100.711,31.394 ; D2.2 98.577,19.227 98.577,26.086 100.901,28.41 C1.2@100.901,31.394 ; D2.2@98.369,18.72 104.013,18.72 P1.1
BOOT: P2.3 SW2.3 SW2.4 U2.25 | length 62.3
  Top Layer w0.4: P2.3 25.171,52.908 30.404,47.676 30.404,43.205 29.587,42.389 U2.25 ; U2.25@29.587,40.763 29.837,40.513 31.775,40.513 33.655,38.633 33.655,13.564 30.915,10.823 30.915,9.855 SW2.4 ; SW2.4@30.818,9.804 SW2.3@41.024,9.804
CAN_H: L2.4 P4.3 R2.1 | length 25.2
  Top Layer w0.3: R2.1 98.707,8.718 L2.4 94.1,8.772 94.1,9.467 94.996,10.363 99.695,10.363 103.607,14.275 111.557,14.275 P4.3
CAN_H_IC: L2.1 U4.7 | length 5.9
  Top Layer w0.3: U4.7 89.21,8.433 L2.1
CAN_L: L2.3 P4.4 P5.2 | length 20.4
  Top Layer w0.4: L2.3 94.27,6.218 94.697,5.791 101.346,5.791 P5.2 109.525,9.703 P4.4
CAN_L_IC: L2.2 U4.6 | length 6.2
  Top Layer w0.3: U4.6 88.55,7.163 L2.2
CAN_RX: U2.26 U4.4 | length 77.9
  Top Layer w0.3: U2.26 28.092,41.138 28.092,45.204 28.837,45.949 v2(28.931,45.949) ; v2(39.243,43.18) 39.243,33.401 67.386,5.258 77.267,5.258 77.854,5.845 78.404,5.845 U4.4
  Bottom Layer w0.3: v2(28.931,45.949) 36.474,45.949 v2(39.243,43.18)
CAN_TX: U2.29 U4.1 | length 75.8
  Top Layer w0.3: U2.29 24.507,46.351 v2(25.908,47.752) ; v2(38.354,47.854) 38.516,47.691 39.126,47.691 77.114,9.703 U4.1
  Bottom Layer w0.3: v2(25.908,47.752) 25.959,47.803 38.303,47.803 v2(38.354,47.854)
EN: C7.1 P2.4 R1.1 SW1.3 SW1.4 U2.3 | length 85.4
  Top Layer w0.3: SW1.4 SW1.3 24.359,14.275 20.56,18.073 ; U2.3 15.617,20.67 C7.1 15.561,18.377 15.864,18.073 R1.1 20.56,18.073 ; v2(24.511,18.136) 24.449,18.073 20.56,18.073 ; P2.4 27.711,53.188 28.626,52.273 36.779,44.12 36.779,22.581 v2(35.966,21.768)
  Bottom Layer w0.3: v2(24.511,18.136) 32.41,18.136 35.966,21.692 v2(35.966,21.768)
GND: C1.1 C2.1 C3.1 C4.2 C5.2 C6.1 C7.2 C8.2 C9.2 C10.2 D1.1 D2.1 D3.2 D4.2 P2.5 P3.2 P4.2 SW1.1 SW1.2 SW2.1 SW2.2 U1.3 U1.5 U1.6 U2.1 U2.15 U2.38 U2.39_1 U2.39_2 U2.39_3 U2.39_4 U2.39_5 U2.39_6 U2.39_7 U2.39_8 U2.39_9 U2.39_10 U2.39_11 U2.39_12 U2.39_13 U2.39_14 U2.39_15 U2.39_16 U2.39_17 U2.39_18 U2.39_19 U2.39_20 U2.39_21 U3.1 U4.2 U4.8 | length 0.9
  Top Layer w0.254: U2.39_15 U2.39_5
  other v1: 4.184,6.978 18.184,6.978 46.184,6.978 53.184,6.978 60.184,6.978 81.184,6.978 109.184,6.978 14.684,13.978 21.684,13.978 28.684,13.978 35.684,13.978 42.684,13.978 49.684,13.978 63.684,13.978 77.684,13.978 84.684,13.978 91.684,13.978 4.184,20.978 25.184,20.978 39.184,20.978 46.184,20.978 60.184,20.978 74.184,20.978 81.184,20.978 95.184,20.978 102.184,20.978 14.684,27.978 49.684,27.978 63.684,27.978 77.684,27.978 91.684,27.978 105.684,27.978 112.684,27.978 25.184,34.978 46.184,34.978 60.184,34.978 95.184,34.978 102.184,34.978 109.184,34.978 77.684,41.978 84.684,41.978 91.684,41.978 105.684,41.978 112.684,41.978 46.184,48.978 60.184,48.978 88.184,48.978 42.684,55.978 77.684,55.978 84.684,55.978 91.684,55.978 98.684,55.978 105.684,55.978
NetD1_2: D1.2 L1.1 U1.2 | length 33.3
  Top Layer w0.8: U1.2 87.781,36.523 90.932,39.675 98.044,39.675 100.372,42.002 D1.2 L1.1
NetD3_1: D3.1 R3.2 | length 3.8
  Top Layer w0.3: D3.1 48.224,51.836 48.375,51.987 R3.2
NetD4_1: D4.1 R4.2 | length 2.6
  Top Layer w0.4: D4.1 13.106,45.94 R4.2
NetP1_2: P1.2 P4.1 | length 8
  Top Layer w0.8: P1.2 109.347,22.53 111.41,20.467 111.41,19.908 P4.1
NetP5_1: P5.1 R2.2 | length 6
  Top Layer w0.4: R2.2 100.813,8.862 104.142,12.192 105.206,12.192 P5.1
RXD0: P2.2 U2.34 | length 16.5
  Top Layer w0.4: U2.34 18.157,50.694 22.267,54.805 22.267,54.888 22.631,55.252 P2.2
SCL: P3.3 U2.36 | length 16.9
  Top Layer w0.4: P3.3 15.316,50.622 15.316,41.948 15.367,41.897 15.367,41.164 U2.36
SDA: P3.4 U2.33 | length 19.2
  Top Layer w0.4: P3.4 12.852,55.512 14.884,53.48 v2(14.884,53.365) ; U2.33 19.677,41.164 19.677,42.004 20.142,42.469 20.142,50.038 v2(20.091,50.089)
  Bottom Layer w0.4: v2(14.884,53.365) 16.815,53.365 v2(20.091,50.089)
STAT_LED: R4.1 U2.37 | length 3.4
  Top Layer w0.4: R4.1 13.211,43.736 13.211,42.999 14.097,42.113 14.097,41.164 U2.37
TXD0: P2.1 U2.35 | length 16
  Top Layer w0.4: U2.35 16.887,52.345 P2.1
pads on no net: U2.4 U2.5 U2.6 U2.7 U2.8 U2.9 U2.10 U2.11 U2.12 U2.13 U2.14 U2.16 U2.17 U2.18 U2.19 U2.20 U2.21 U2.22 U2.23 U2.24 U2.27 U2.28 U2.30 U2.31 U2.32

## Polygon pours and split planes (outlines as drawn)
3V3 on Bottom Layer "3V3B" (solid, remove dead copper, pour order 8): 62.103,59.893 72.39,59.893 72.39,47.981 62.103,47.981
GND on Bottom Layer "espthermal" (solid, remove dead copper, pour order 15): 0.002,60 115,60 115,0 -0.07,0
GND on Top Layer "espthermal" (solid, remove dead copper, pour order 2): 0,60 115,60 115,0.025 0,0.025

## Silkscreen, mask and mechanical layers (free items; w line width, h text height)
Top Overlay:
  drawing of 20 lines, arcs and shapes, not listed
  text "3V3" at 2.946,57.928 h1.5
  text "GND" at 5.715,57.903 h1.5
  text "SCL" at 9.271,57.903 h1.52
  text "SDA" at 12.243,57.903 h1.52
  text "TX" at 18.694,57.81 h1.5
  text "RX" at 20.828,57.81 h1.5
  text "BOOT" at 23.216,57.801 h1.5
  text "GND" at 29.743,57.801 h1.5
  text "5V" at 33.249,57.801 h1.5
  text "EN" at 27.457,57.785 h1.5
  text "12V" at 113.792,21.641 h1 r270
  text "GND" at 113.777,18.872 h1 r270
  text "CANH" at 113.803,15.596 h1 r270
  text "CANL" at 113.828,12.421 h1 r270
  text "CODE-OXYY / APRIL 26 / ALTIUM / E N G L I N K  VER 1.0 / MCU: EESP32-WROOM-32" at 43.815,1.651 h1
Mechanical 1:
  lines w0.2: 0,1.27 ccw(c1.27,1.27) 1.27,0 2.5,0 113.73,0 ccw(c113.73,1.27) 115,1.27 115,58.73 ccw(c113.73,58.73) 113.73,60 1.27,60 ccw(c1.27,58.73) 0,58.73 0,55 0,1.27

## Text inside footprints (layer, text, board x,y; h text height)
U2: Top 3D Body "ANTENNA" at 9.337,26.414 h1.78 r90